# Altium PCB ST_LINK_V2-1.PcbDoc
Units mm, origin at the board's own origin, x right, y up, seen from the top; angles counter-clockwise.
Board outline 30 x 15 mm, 2 copper layers (Top Layer, Bottom Layer); 35 components, 35 nets, 144 pads, 65 vias.
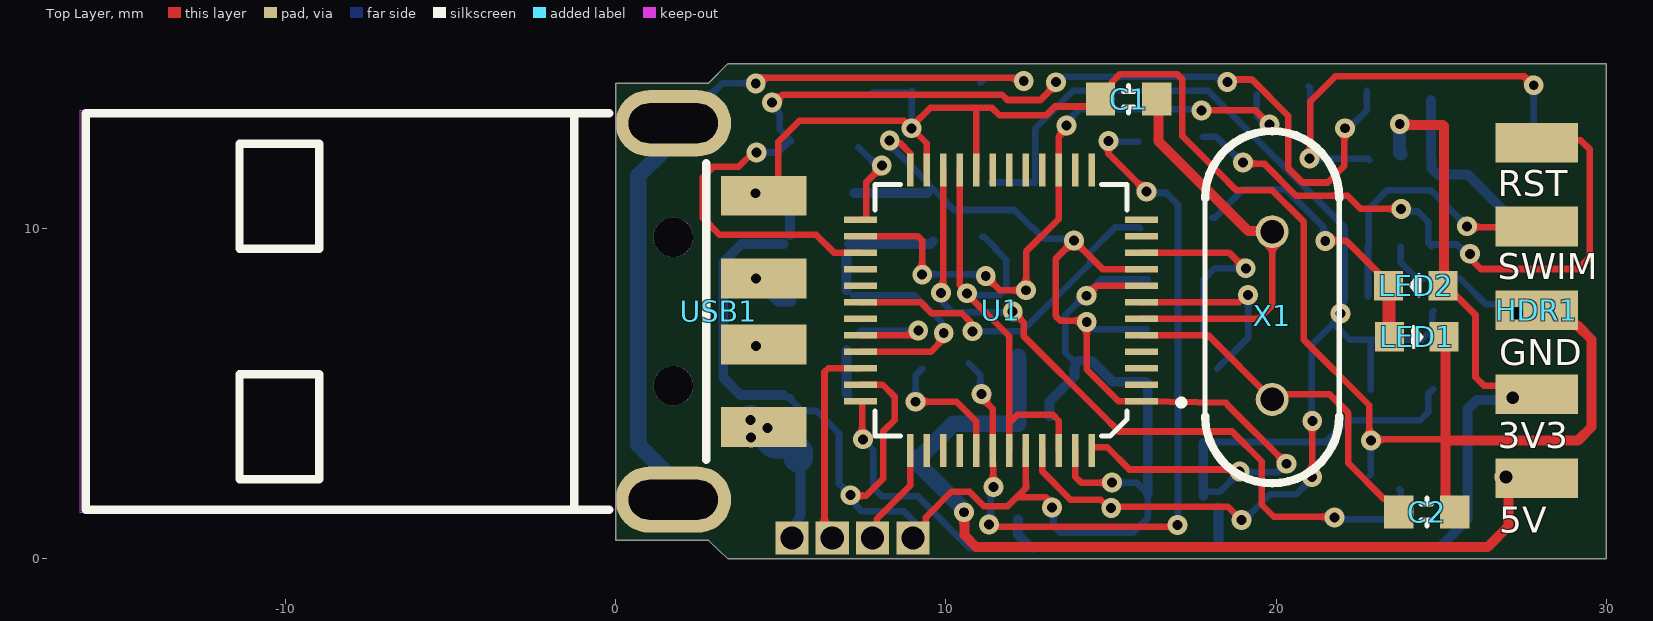
[diagram p0: Top Layer view]
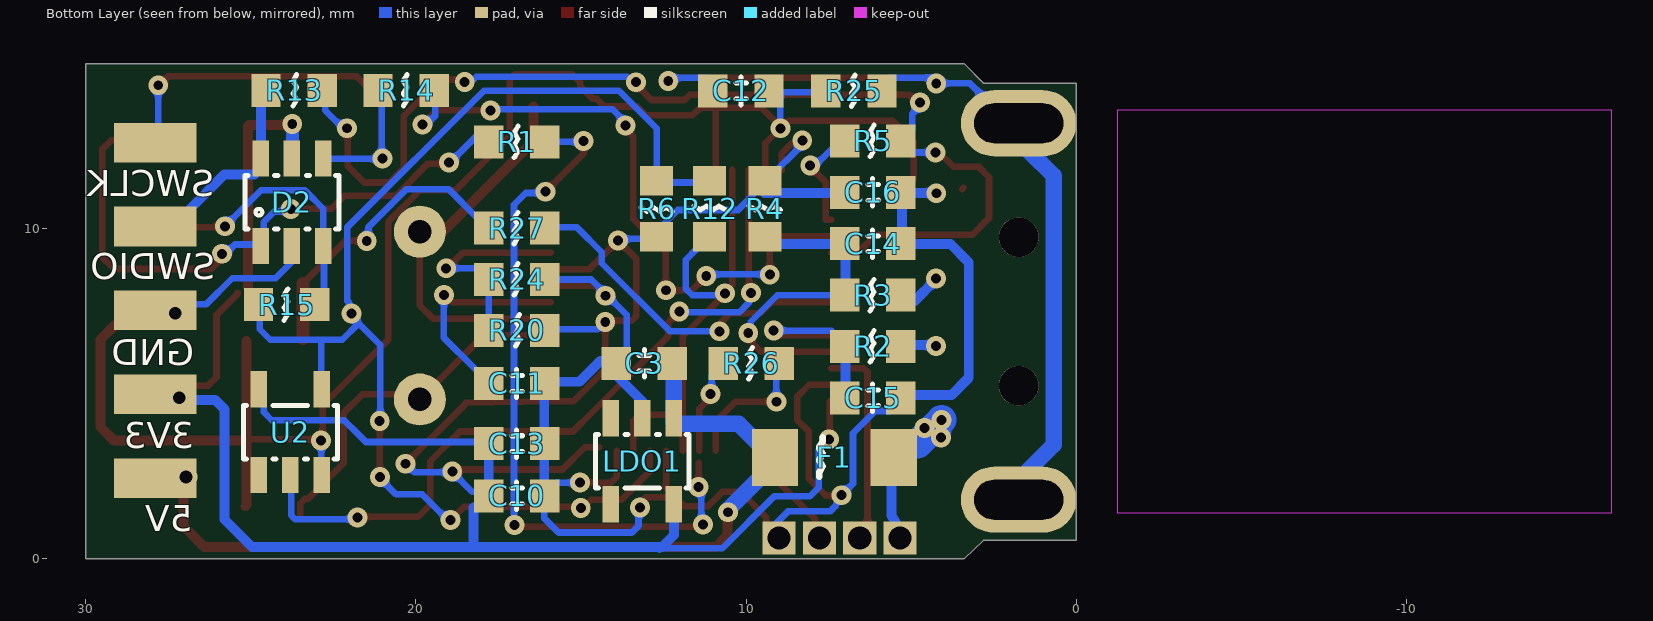
[diagram p1: Bottom Layer view, seen from below]
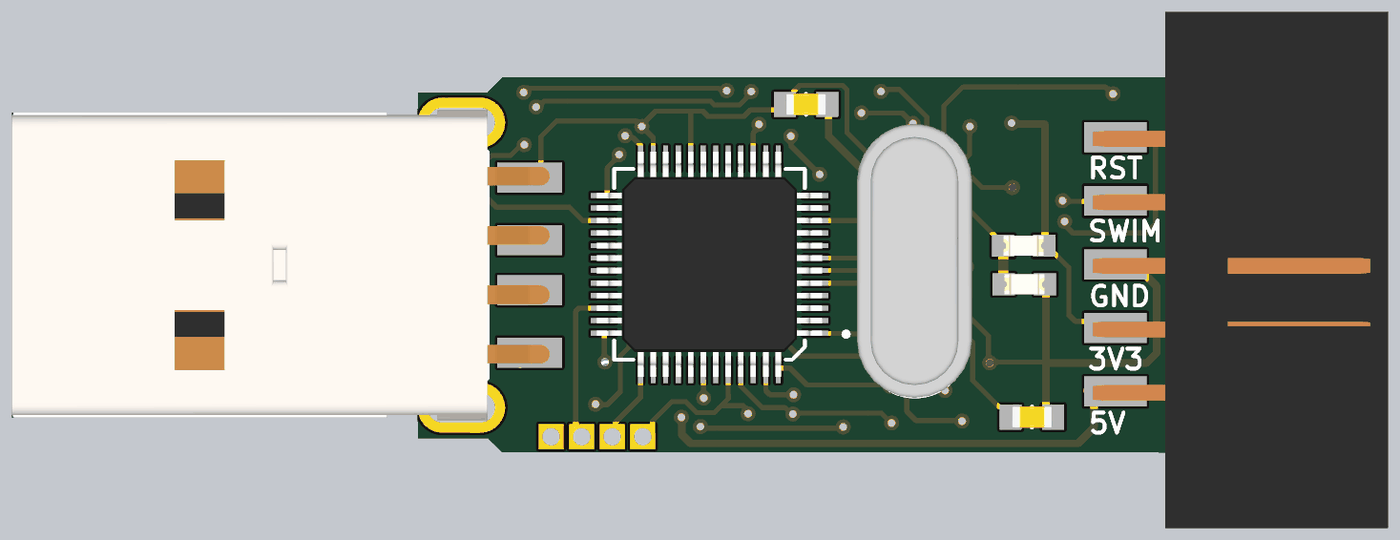
[diagram p2: 3D render of the assembled board from above, using the file's embedded part models]
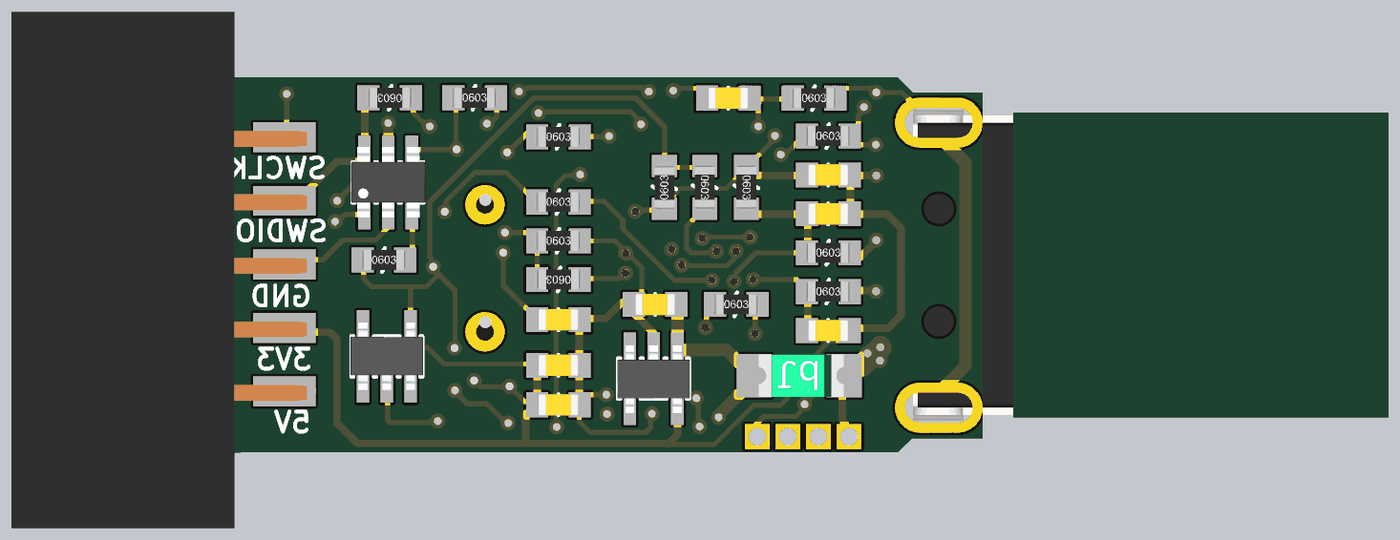
[diagram p3: 3D render of the assembled board from below, using the file's embedded part models]

## Layer stack, top to bottom
Top Solder: solder mask 0.0102, Solder Resist, Dk 3.5
Top Layer: signal copper 0.0356
Dielectric 1: dielectric 0.32, FR-4, Dk 4.8
Bottom Layer: signal copper 0.0356
Bottom Solder: solder mask 0.0102, Solder Resist, Dk 3.5

## Board outline
0,0.56 2.809,0.56 3.4,0 30,0 30,15 3.4,15 2.8,14.4 0,14.4

## Design rules (kind name [scope] priority, off if disabled: settings)
Clearance [All] p1: gap=0.15 ignorepadtopadclearanceinfootprint=FALSE
DiffPairsRouting [All] p1: maxlimit=0.254 minlimit=0.254 mostfreqgap=0.254 toplayer_minwidth=0.381 toplayer_maxwidth=0.381 toplayer_prefwidth=0.381 bottomlayer_minwidth=0.381 bottomlayer_maxwidth=0.381 bottomlayer_prefwidth=0.381 maxuncoupledlength=12.7
HoleSize [All] p1: absolutevalues=TRUE maxlimit=4 minlimit=0.025 maxpercent=80.000 minpercent=20.000
MinimumSolderMaskSliver [All] p1: minsoldermaskwidth=0
PolygonConnect CAM_PolygonConnect_$Net0 [InNet('$Net0')] p1: connectstyle=Direct reliefconductorwidth=0.254 reliefentries=4 polygonreliefangle="90 Angle" airgapwidth=0.254
PolygonConnect [All] p2: connectstyle=Relief reliefconductorwidth=0.254 reliefentries=4 polygonreliefangle="90 Angle" airgapwidth=0.254
RoutingVias [All] p1: holewidth=0.711 width=1.27 viastyle="Through Hole" minholewidth=0.711 minwidth=1.27 maxholewidth=0.711 maxwidth=1.27
SilkToSilkClearance [All] p1: silktosilkclearance=0
SilkToSolderMaskClearance [IsPad] p1: minsilkscreentomaskgap=0 clearancetoexposedcopper=TRUE
SolderMaskExpansion [All] p1: expansion=0.102 istentingtop=FALSE
SupplyNets "Schematic Supply Nets_6" [InNet('+3V3')] p1: voltage=0.000
SupplyNets "Schematic Supply Nets_5" [InNet('EGND')] p2: voltage=0.000
SupplyNets "Schematic Supply Nets_4" [InNet('VUSB')] p3: voltage=0.000
SupplyNets "Schematic Supply Nets" [InNet('GND')] p4: voltage=0.000
Width [All] p1: maxlimit=1 minlimit=0.2 preferedwidth=0.254
25 further rules are at their usual default settings.

## Classes and differential pairs
differential pair USB: +USB_P -USB_N

## Components (designator, comment, footprint, x,y, rotation, side; value= is the part's Value field where it differs from the comment)
C1 "20pF" C0603-NO 15.531,13.922 r180 top
C2 "20pF" C0603-NO 24.556,1.418 r0 top
C3 "100nF" C0603-NO 13.08,5.924 r180 bottom
C10 "100nF" C0603-NO 16.941,1.91 r0 bottom
C11 "100nF" C0603-NO 16.941,5.313 r0 bottom
C12 "100nF" C0603-NO 10.153,14.173 r0 bottom
C13 "100nF" C0603-NO 16.941,3.489 r0 bottom
C14 "47pF" C0603-NO 6.16,9.546 r0 bottom
C15 "47pF" C0603-NO 6.16,4.88 r0 bottom
C16 "100nF" C0603-NO 6.16,11.101 r0 bottom
D2 "SRV05-4" SOT23-6 23.752,10.801 r180 bottom
F1 "Resistor_FUSE" F1206 7.747,3.074 r0 bottom value=500mA
HDR1 "Header 5X2" IDC10_2SIDED 27.894,7.526 r0 top locked
LDO1 "XC6204B332MR" SOT23-5L 13.142,2.956 r0 bottom
LED1 "*" "CHIPLED_0603 - NO" 24.257,6.731 r270 top value=GREEN
LED2 "*" "CHIPLED_0603 - NO" 24.226,8.27 r90 top value=BLUE
R1 "100R" R0603-NO 16.941,12.626 r180 bottom
R2 "22R" R0603-NO 6.16,6.435 r180 bottom
R3 "22R" R0603-NO 6.16,7.991 r180 bottom
R4 "1.8K" R0603-NO 9.431,10.606 r270 bottom
R5 "100R" R0603-NO 6.16,12.656 r180 bottom
R6 "630R" R0603-NO 12.708,10.606 r90 bottom
R12 "220R" R0603-NO 11.1,10.606 r270 bottom
R13 "100R" R0603-NO 23.685,14.19 r0 bottom
R14 "100R" R0603-NO 20.295,14.19 r180 bottom
R15 "100R" R0603-NO 23.912,7.703 r180 bottom
R20 "10K" R0603-NO 16.941,6.92 r0 bottom
R24 "10K" R0603-NO 16.941,8.465 r180 bottom
R25 "1M" R0603-NO 6.731,14.173 r180 bottom
R26 "220R" R0603-NO 9.838,5.924 r180 bottom
R27 "1K" R0603-NO 16.941,10.021 r180 bottom
U1 "STM32F103CBT6" "QFP48 7X7" 11.665,7.526 r90 top locked
U2 "74LVC1G07GV,125" SOT23-5L 23.8,3.84 r180 bottom
USB1 "USB ConnectorsUSBMINIB - Surface Mount Female Mini-B USB Connector 4UConnector: 06564   By microbuilder.euThru-hole RA Female Mini-B USB Connector 4UConnector: 18732   By ladyada.net" USB-A-SMT_48037-0001 2.794,7.493 r270 top locked
X1 "8MHz" XTAL1 19.878,7.369 r270 top locked

## Footprints (in the part's own frame and the unit in brackets; to place one, negate y for a bottom-side part, rotate by r counter-clockwise, add the part's x,y. Pads: shape width x height; smd on the part's side, far side on the other; paste and mask are expansions set on the pad)
C0603-NO [mm]
  rect 0.889x1 smd mask+0.102: 1(-0.85,0) 2(0.85,0)
  silkscreen extent -0.16,-0.42 0.15,0.42, body extent -0.8,-0.43 0.81,0.43, height 0.8
"CHIPLED_0603 - NO" [mil]
  rect 35x35 smd: A(0,-32.5) C(0,32.5)
  silkscreen extent -11,-4 12,5, body extent -16,-31 16,31, height 22
F1206 [mm]
  rect 1.4x1.72 smd: 1(-2.222,0) 2(1.376,0)
  silkscreen extent -0.07,-0.6 0.04,0.58, body extent -2.21,-0.85 1.19,0.85, height 0.51
IDC10_2SIDED [mm]
  rect 2.5x1.2 smd: 1(0,5.08) 3(0,2.54) 5(0,0) 7(0,-2.54) 9(0,-5.08)
  rect 2.5x1.2 smd far side: 2(0,5.08) 4(0,2.54) 6(0,0) 8(0,-2.54) 10(0,-5.08)
  body extent -0.9,-10.55 10.9,10.09, height 4.13
"QFP48 7X7" [mm]
  rect 0.2x1 smd: 1(-2.75,-4.25) 2(-2.25,-4.25) 3(-1.75,-4.25) 4(-1.25,-4.25) 5(-0.75,-4.25) 6(-0.25,-4.25) 7(0.25,-4.25) 8(0.75,-4.25) 9(1.25,-4.25) 10(1.75,-4.25) 11(2.25,-4.25) 12(2.75,-4.25) 25(2.75,4.25) 26(2.25,4.25) 27(1.75,4.25) 28(1.25,4.25) 29(0.75,4.25) 30(0.25,4.25) 31(-0.25,4.25) 32(-0.75,4.25) 33(-1.25,4.25) 34(-1.75,4.25) 35(-2.25,4.25) 36(-2.75,4.25)
  rect 1x0.2 smd: 13(4.25,-2.75) 14(4.25,-2.25) 15(4.25,-1.75) 16(4.25,-1.25) 17(4.25,-0.75) 18(4.25,-0.25) 19(4.25,0.25) 20(4.25,0.75) 21(4.25,1.25) 22(4.25,1.75) 23(4.25,2.25) 24(4.25,2.75) 37(-4.25,2.75) 38(-4.25,2.25) 39(-4.25,1.75) 40(-4.25,1.25) 41(-4.25,0.75) 42(-4.25,0.25) 43(-4.25,-0.25) 44(-4.25,-0.75) 45(-4.25,-1.25) 46(-4.25,-1.75) 47(-4.25,-2.25) 48(-4.25,-2.75)
  silkscreen extent -3.81,-5.52 3.81,3.81, body extent -4.5,-4.5 4.5,4.51, height 1.02
R0603-NO [mm]
  rect 0.889x1 smd: 1(-0.85,0) 2(0.85,0)
  silkscreen extent -0.08,-0.48 0.04,0.48, body extent -1.06,-0.4 1.04,0.4, height 0.5
SOT23-5L [mm]
  rect 0.5x1.1 smd: 1(-0.95,-1.3) 2(0,-1.3) 3(0.95,-1.3) 4(0.95,1.3) 5(-0.95,1.3)
  silkscreen extent -1.42,-0.81 1.42,0.81, body extent -1.45,-1.33 1.45,1.37, height 1.45
SOT23-6 [mm]
  rect 0.5x1.1 smd: 1(-0.95,-1.327) 2(0,-1.327) 3(0.95,-1.327) 4(0.95,1.327) 5(0,1.327) 6(-0.95,1.327)
  silkscreen extent -1.42,-0.81 1.42,0.81, body extent -1.49,-1.41 1.51,1.43, height 1.2
USB-A-SMT_48037-0001 [mm]
  rect 1.2x2.6 smd: 1(3.5,1.686) 2(1,1.686) 3(-1,1.686) 4(-3.5,1.686)
  oval 2x3.5 hole 1.2 slot 2.7 at 90 deg: 5(-5.7,-1.05) 5(5.7,-1.05)
  round 1.2 hole 1.2 unplated: ""(-2.25,-1.05) ""(2.25,-1.05)
  Keep-Out Layer board cut-out: -6.096,-4.03 6.096,-4.03 6.096,-19.016 -6.096,-19.016
  silkscreen extent -6,-18.85 6,-0.05, body extent -6.21,-19.02 6.21,2.49, height 4.45
XTAL1 [mm]
  round 1 / inner round 1.575 / far side round 1.575 hole 0.711: 1(-2.54,0) 2(2.54,0)
  silkscreen extent -5.59,-2.03 5.08,2.03, body extent -5.77,-2.31 5.18,2.29, height 3.35

## Part data
C1 C2 C3 C10 C11 C12 C13 C14 C15 C16: library part Cap_0603, "CAP CER ?nF ?V X7R 0603"
D2: Breakdown Voltage=9V, JLCPCB Part Class="Extended Part", Manufacturer=MSKSEMI(美森科), Maximum Clamping Voltage=15V, Peak Pulse Power Dissipation (Ppp)@10/1000us=60W, Reverse Stand-Off Voltage (Vrwm)=5V, Add into BOM=yes, Convert to PCB=yes, Datasheet=https://atta.szlcsc.com/upload/public/pdf/source/20220222/F01BB54FA817A9A0327E7B3253CC806E.pdf, Device=SRV05-4_C2836319, LCSC Part Name=SRV05-4, Manufacturer Part=SRV05-4, Supplier=LCSC, Supplier Footprint=SOT-23-6, Supplier Part=C2836319, Symbol=SRV05-4_C2836319, Type=ESD
F1: "Resetable fuse"
HDR1: "Header, 5-Pin, Dual row", Revision="17-Jul-2002: Re-released for DXP Platform."
LDO1: Dropout Voltage=330mV@(100mA), JLCPCB Part Class="Extended Part", LCSC Part Name="输入10V 输出3.3V 150mA", Manufacturer=TOREX(特瑞仕), Max Output Current=150mA, Maximum Input Voltage=10V, Output Voltage=3.3V, Power Supply Rejection Ratio (PSRR)=70dB@(10kHz), Add into BOM=yes, Convert to PCB=yes, Datasheet=https://atta.szlcsc.com/upload/public/pdf/source/20170421/1492744953040.pdf, Device=XC6204B332MR, Manufacturer Part=XC6204B332MR, Number of Outputs=1, Output Polarity="Positive electrode", Supplier=LCSC, Supplier Footprint=SOT-23-5, Supplier Part=C80697, Symbol=XC6204B332MR
LED1 LED2: library part LEDCHIP-LED0603, "SMD lamp beads"
R1 R2 R3 R4 R5 R6 R12 R13 R14 R15 R20 R24 R25 R26 R27: library part Res_0603, "RES SMD ?K OHM 1% 1/10W 0603"
U1: "Medium-density performance line ARM-based 32-bit MCU with 64KB Flash", Manuf_1=STM, Manuf_Part_1=STM32F103C8T6, Distrib=ST, ECCN_US/EU=3A991A2/NEC, Order=STM32F103C8T6, Provided=ST, Ref St=9175981
U2: JLCPCB Part Class="Extended Part", Manufacturer=Nexperia(安世), Operating Temperature=-40℃~+125℃, Sink Current=32mA, Supply Voltage=1.65V~5.5V, Add into BOM=yes, Convert to PCB=yes, Datasheet=https://atta.szlcsc.com/upload/public/pdf/source/20130521/1457706602667.pdf, Device=74LVC1G07GV,125, LCSC Part Name=74LVC1G07GV,125, Logic Family=74LVC, Manufacturer Part=74LVC1G07GV,125, Number of Bits per Element=1, Number of Elements=1, Output Type="Open Drain", Supplier=LCSC, Supplier Footprint=SOT-753, Supplier Part=C12511, Symbol=74LVC1G07GV,125
USB1: library part USB-MALE, NAME=USB_Micro_5S_B
X1: library part XTAL, "Crystal Oscillator", LatestRevisionDate=17-Jul-2002, LatestRevisionNote="Re-released for DXP Platform.", PackageReference=R38, Published=8-Jun-2000, Publisher="Altium Limited"

## Free pads (board coordinates)
  rect 1x1 hole 0.7: 2(5.334,0.631) 2(6.555,0.631) 2(7.777,0.631) 2(8.998,0.631)

## Via types
v1: diameter 0.6, hole 0.3, Top Layer to Bottom Layer, tented both sides, 62 vias
v2: diameter 0.686, hole 0.381, Top Layer to Bottom Layer, tented both sides, 3 vias

## Nets (pads, with @x,y where several pads share a name; then routed paths per layer and width w, separated by ;. In a path a pad name is that pad's centre, name@x,y a point inside that pad or via, vN(x,y) a via of type N, cw(c..) or ccw(c..) an arc to the next point about the centre after c; other vN are vias at no path point)
+3V3: C10.2 C13.2 C16.2 D2.5 HDR1.7 HDR1.8 LDO1.5 LED2.A R4.1 R6.1 R20.1 U1.1 U1.9 U1.24 U1.36 U1.48 U2.5 | length 85.1
  Top Layer w0.2: U1.36 7.461,4.776 7.461,3.646 v1(7.486,3.621) ; v1@8.295,12.628 8.332,12.592 8.608,12.592 8.915,12.285 U1.24 ; U1.48@14.446,3.381 14.883,3.381 15.557,2.707 18.833,2.707 v1(18.894,2.646) ; U1.9 14.737,8.776 v1(13.873,9.639) 13.32,9.086 13.32,7.36 13.462,7.218 14.219,7.218 v1(14.262,7.175) 14.262,5.738 15.224,4.776 U1.1 18.481,4.728 ; 18.514,4.68 v1(20.312,2.882) ; LED2.A@25.4,8.064 25.4,8.025 26.035,7.39 26.035,5.502 26.29,5.247 27.634,5.247 HDR1.7
  Top Layer w0.3: v1@23.733,13.144 25.043,13.144 25.082,13.105 LED2.A@25.082,8.223
  Bottom Layer w0.2: v1(7.486,3.621) 7.486,3.617 7.799,3.304 7.799,2.161 8.067,1.893 9.148,1.893 10.716,0.325 12.581,0.325 12.621,0.286 ; v1@8.215,12.628 R4.1@9.406,11.438 ; R4.1@9.446,11.398 9.446,11.358 10.239,10.565 12.065,10.565 12.581,10.049 12.621,10.049 12.978,9.692 13.851,9.692 v1@13.93,9.612 ; v1@14.248,7.152 14.287,7.152 14.486,6.953 R20.1@16.073,6.953 ; C10.2 17.913,2.032 18.296,2.032 18.891,2.627 20.042,2.627 20.305,2.89 v1@20.32,2.905 ; C13.2@18.018,3.54 21.511,3.54 21.749,3.778 22.171,4.2 24.36,4.2 24.6,4.44 24.6,4.99 U2.5
  Bottom Layer w0.3: C16.2@7.223,11.081 R4.1@9.446,11.081 ; LDO1.5@12.184,1.198 12.184,0.722 12.541,0.365 24.963,0.365 25.797,1.198 25.797,4.532 26.075,4.81 27.345,4.81 HDR1.8@27.384,4.85 ; C10.2 C13.2 ; 18.256,0.405 18.256,1.556
  Bottom Layer w0.4: v1@23.733,13.224 23.733,12.311 D2.5@23.773,12.271
  other v1: 8.295,12.668 23.743,13.175
  other v2: 27.16,4.88
AIN_1: R20.2 R24.1 U1.10 | length 6.3
  Top Layer w0.2: U1.10 18.566,9.276 19.042,8.8 v1(19.08,8.8)
  Bottom Layer w0.2: R20.2 R24.1 ; R24.1@17.811,8.465 17.811,8.476 18.135,8.8 v1(19.08,8.8)
EGND: C12.2 R25.2 USB1.5 | length 24.8
  Top Layer w0.2: v1@4.207,14.414 4.216,14.424 4.366,14.573 12.025,14.573 12.144,14.454 v1@12.343,14.454
  Bottom Layer w0.2: USB1.5@1.744,13.193 2.007,13.193 3.215,14.401 v1(4.24,14.401) ; v1@4.326,14.454 4.445,14.573 R25.2@5.675,14.573 ; C12.2@11.033,14.414 11.192,14.573 v1@12.383,14.573
  Bottom Layer w0.5: USB1.5@1.429,12.351 0.68,11.602 0.68,3.455 USB1.5@1.667,2.468
  Bottom Layer w0.6: USB1.5@1.667,2.31 USB1.5@1.667,2.468
  other v1: 12.356,14.471
GND: C1.2 C2.2 C3.1 C10.1 C11.1 C12.1 C13.1 C14.1 C15.1 C16.1 D2.2 HDR1.5 HDR1.6 LDO1.2 LED1.C pad.2@8.998,0.631 R24.2 R25.1 U1.8 U1.20 U1.23 U1.35 U1.44 U1.47 U2.3 USB1.4 | length 106.6
  Top Layer w0.2: USB1.4@3.413,11.239 USB1.4@3.453,11.2 ; USB1.4@4.921,11.477 4.921,12.628 5.556,13.263 8.731,13.263 8.955,13.04 v1(8.96,13.04) ; v1@7.104,1.913 7.58,1.913 8.096,2.429 8.096,3.857 8.453,4.215 8.453,4.907 8.084,5.276 U1.35 ; pad.2@9.078,0.711 9.391,1.023 9.391,1.262 10.16,2.032 10.716,2.032 11.152,1.595 11.867,1.595 12.125,1.853 12.144,1.873 ; U1.23 9.415,12.585 v1(8.96,13.04) ; U1.20 10.915,13.657 ; U1.44 12.415,2.316 12.422,2.308 12.422,2.151 12.144,1.873 ; v1(13.21,1.553) 13.256,1.599 13.256,1.635 13.018,1.873 12.144,1.873 ; U1.47 13.915,2.485 14.09,2.31 v1@15.081,2.31 ; v1(14.252,7.97) 14.263,7.97 14.57,8.276 U1.8 ; 19.874,11.16 18.8,11.16 18.28,11.68 17.16,12.8 17.16,14.518 16.998,14.68 15.268,14.68 15.025,14.438 15.025,14.322 14.633,13.931 14.518,13.931 14.287,13.7 13.3,13.7 13.04,13.44 11.611,13.44 11.393,13.657 10.915,13.657 ; 19.877,11.163 20.84,10.2 20.84,6.632 22.82,4.651 22.82,3.619 25.122,3.619 25.162,3.619 ; v1(8.96,13.04) 8.96,13.095 9.522,13.657 10.915,13.657
  Top Layer w0.3: LED1.C@25.122,6.596 25.122,3.619 25.122,3.58 ; C2.2@25.162,1.595 25.122,1.635 25.122,3.58 ; HDR1.5 28.344,7.076 29.119,7.076 29.548,6.647 29.548,3.997 29.131,3.58 25.122,3.58
  Bottom Layer w0.2: C15.1@5.199,4.889 C15.1@5.239,4.889 ; C15.1 5.301,4.889 C15.1@5.239,4.889 ; v1@6.985,1.913 7.02,1.913 7.263,1.67 7.263,1.634 7.458,1.44 8.728,1.44 pad.2@9.247,0.921 ; v1(7.111,1.93) 6.76,2.281 6.76,3.805 6.085,4.48 5.648,4.48 C15.1@5.239,4.889 ; R25.1@7.779,14.137 8.93,14.137 C12.1@8.969,14.176 ; C12.1@8.93,13.978 8.958,13.978 8.96,13.976 v1(8.96,13.04) ; v1@13.256,1.556 13.256,1 13.456,0.8 15.675,0.8 16.113,1.238 16.113,1.908 16.111,1.91 16.111,1.965 15.767,2.31 15.029,2.31 v1(15.028,2.311) ; C3.1 13.613,6.241 13.613,7.39 14.223,8 14.684,8.461 16.107,8.461 R24.2@16.111,8.465 ; U2.3 22.86,2.55 22.86,3.579 v1(22.869,3.588) ; D2.2@23.773,9.453 23.773,8.977 24.249,8.501 25.559,8.501 26.352,7.707 27.265,7.707 HDR1.6@27.305,7.667
  Bottom Layer w0.3: v1@4.207,11.081 5.199,11.081 5.244,11.035 5.255,11.025 5.278,11.001 C14.1@5.278,9.811 ; C15.1@5.08,4.969 3.77,4.969 3.254,5.485 3.254,8.977 3.81,9.533 C14.1@5.08,9.533 ; LDO1.2@13.137,4.334 13.137,4.77 13.891,5.524 C3.1@13.891,5.762 ; C3.1 14.006,6.001 14.407,6.001 15.042,5.366 16.059,5.366 16.111,5.313 C10.1@16.111,1.965
  other v1: 4.237,11.073
  other v2: 27.28,7.44
LED_STLINK: R27.2 U1.30 | length 10.5
  Top Layer w0.2: U1.30 9.224,7.776 9.56,7.44 10.48,7.44 10.728,7.192 10.728,6.969 v1(10.805,6.892)
  Bottom Layer w0.2: v1(10.805,6.892) 12.306,6.892 14.367,8.953 14.367,9.287 15.129,10.049 15.835,10.049 R27.2@15.875,10.009
NetD2_1: D2.1 HDR1.1 R1.1 | length 19
  Top Layer w0.2: v1(18.99,12.003) 19.023,11.97 19.63,11.97 20.603,10.997 ; 20.606,11 22.16,11 22.562,10.598 v1(23.785,10.598) ; v1@25.876,9.215 25.876,9.096 26.194,8.779 29.131,8.779 29.498,9.146 29.498,12.4 29.218,12.68 27.968,12.68 HDR1.1
  Bottom Layer w0.2: R1.1@17.78,12.787 18.177,12.787 18.975,11.989 v1@19.01,11.954 ; v1(23.785,10.598) 23.861,10.522 24.284,10.522 24.605,10.201 24.605,9.571 D2.1 24.748,9.52 25.477,9.52 25.757,9.24 v1(25.866,9.24)
NetD2_3: D2.3 HDR1.3 R15.2 | length 8.4
  Top Layer w0.2: v1@25.797,10.049 27.877,10.049 HDR1.3
  Bottom Layer w0.2: R15.2@22.781,7.945 D2.3@22.781,9.453 ; D2.3 22.802,10.602 23.36,11.16 24.695,11.16 v1(25.782,10.072)
NetD2_4: D2.4 HDR1.2 R14.1 | length 14.7
  Top Layer w0.2: v1(21.01,12.125) 21.034,12.15 21.034,13.859 21.788,14.613 27.503,14.613 v1@27.781,14.335
  Bottom Layer w0.2: R14.1@20.995,14.295 21.034,14.256 v1@21.034,12.152 ; v1@21.034,12.112 22.781,12.112 D2.4@22.82,12.073 ; v1(27.8,14.343) 27.8,12.7 HDR1.2
NetD2_6: D2.6 HDR1.4 R13.2 | length 4.8
  Bottom Layer w0.3: D2.6@24.686,12.192 R13.2@24.686,13.898 ; D2.6 24.702,11.828 24.89,11.64 25.8,11.64 HDR1.4@26.915,10.525
NetF1_1: F1.1 pad.2@5.334,0.631 USB1.1 | length 4.9
  Bottom Layer w0.3: pad.2@5.278,0.682 5.278,0.802 5.596,1.317 5.596,3.003 F1.1
  Bottom Layer w0.6: v1@4.08,3.865 v1(4.08,4.21)
  Bottom Layer w0.9: v1(4.08,4.21) 4.807,3.484 5.274,3.484 5.524,3.234 F1.1
  other v1: 4.097,3.675 4.597,3.967
NetLED1_A: LED1.A LED2.C R27.1 | length 8.8
  Top Layer w0.2: v1(21.486,9.632) 22.126,9.632 LED2.C@23.416,8.342
  Top Layer w0.4: LED1.A@23.416,6.675 LED2.C@23.416,8.342
  Bottom Layer w0.2: R27.1@18.058,10.327 18.137,10.327 19.01,11.2 20.28,11.2 21.431,10.049 21.431,9.771 v1@21.528,9.674
NetR2_2: R2.2 USB1.2 | length 0.9
  Bottom Layer w0.3: v1@4.247,6.477 R2.2@5.12,6.477
  other v1: 4.251,6.447
NetR3_2: R3.2 USB1.3 | length 1.4
  Bottom Layer w0.3: v1@4.247,8.501 4.247,8.461 4.921,7.787 R3.2@5.318,7.787
  other v1: 4.242,8.491
NetR26_2: R26.2 U1.41 | length 4.1
  Top Layer w0.2: v1(9.08,4.76) 10.32,4.76 10.915,4.165 U1.41
  Bottom Layer w0.2: v1(9.08,4.76) 9.08,5.556 R26.2@9.287,5.762
OSC_IN: C2.1 U1.5 X1.2 | length 11
  Top Layer w0.2: U1.5 17.93,6.776 X1.2 20.031,4.982 20.39,4.982 20.395,4.987 21.613,4.987 22.186,4.414 22.186,2.894 23.262,1.818 23.362,1.818 23.495,1.684 C2.1@23.495,1.357
OSC_OUT: C1.1 U1.6 X1.1 | length 12
  Top Layer w0.2: U1.6 19.476,7.276 19.878,7.678 X1.1
  Top Layer w0.3: C1.1@16.431,13.7 16.431,12.649 19.153,9.927 19.859,9.927 X1.1
PB11: U1.22 U2.2 | length 22.4
  Top Layer w0.2: v1(9.845,8.058) 9.915,8.128 U1.22 ; v1(12.02,7.492) 12.36,7.152 12.36,6.737 14.684,4.413 15.24,3.857 18.663,3.857 19.56,2.96 19.56,1.641 19.923,1.278 v1@21.749,1.278
  Bottom Layer w0.2: v1@9.763,7.906 9.888,7.906 9.921,7.873 9.921,7.748 10.2,7.469 v1@11.986,7.469 ; v1@21.749,1.198 23.654,1.198 23.773,1.317 23.773,2.072 U2.2@23.733,2.111
  other v1: 21.764,1.257
STLINK_RX: U1.13
STLINK_TX: U1.12
STM_JTCK: pad.2@7.777,0.631 U1.37 | length 3.1
  Top Layer w0.2: pad.2@7.898,0.643 7.898,1.198 8.915,2.215 U1.37
STM_JTMS: pad.2@6.555,0.631 U1.34 | length 6.3
  Top Layer w0.2: pad.2@6.555,0.631 6.32,0.866 6.32,5.659 6.437,5.776 U1.34
STM_RST: C11.2 U1.7 | length 5.8
  Top Layer w0.2: U1.7 18.88,7.776 19.099,7.995 v1(19.149,7.995)
  Bottom Layer w0.2: C11.2@18.217,5.762 19.149,6.694 v1@19.149,7.835
SWIM: R6.2 R12.1 R15.1 U1.45 U2.4 | length 37.7
  Top Layer w0.2: U1.45 12.915,2.65 12.938,2.627 13.772,1.794 14.684,1.794 v1@14.922,1.556 ; v1(15.002,1.539) v1@15.023,1.56 ; v1@15.023,1.58 18.537,1.58 18.937,1.18 v1(18.946,1.18) ; v1(21.08,2.482) 21.087,2.489 21.087,4.169 v1(21.093,4.176)
  Bottom Layer w0.2: R12.1@11.351,11.398 12.7,11.398 12.7,13.025 13.851,14.176 17.939,14.176 22.08,10.035 22.08,7.821 22.023,7.764 22.023,7.505 v1(21.946,7.428) ; v1@18.971,1.079 18.971,1.119 18.989,1.137 19.804,1.952 20.598,1.952 v1@21.074,2.429 ; v1@21.074,4.175 21.074,6.477 v1@21.907,7.31 ; 21.749,7.112 22.225,6.636 22.86,6.636 ; U2.4@22.86,5.127 22.86,6.636 ; R15.1@24.765,7.509 24.725,7.469 24.725,6.953 24.408,6.636 22.86,6.636
SWIM_IN: R12.2 U1.21 U1.43 U1.46 | length 14.9
  Top Layer w0.2: U1.21 10.415,8.289 10.594,8.11 v1@10.594,8.002 ; v1@10.625,8.034 11.915,6.744 11.915,4.115 ; U1.43 11.915,4.115 ; U1.46 13.415,4.185 13.24,4.36 12.16,4.36 11.915,4.115
  Bottom Layer w0.2: v1@10.597,7.985 11.628,7.985 11.829,8.186 ; R12.2 11.155,9.756 11.5,9.412 11.5,9.382 11.825,9.056 11.825,8.19
  other v1: 10.634,8.042
T_JTCK: R14.2 U1.15 U1.26 | length 19.5
  Top Layer w0.2: U1.26 9.144,9.776 9.279,9.641 v1(9.279,8.607) ; v1(11.204,8.563) 11.631,8.135 v1(12.425,8.135) 12.425,9.305 13.415,10.295 U1.15 13.415,12.788 13.645,13.018 v1(13.645,13.126) ; v1(17.74,13.581) 19.372,13.581 19.793,13.16 v1(19.8,13.16)
  Bottom Layer w0.2: v1@9.287,8.62 11.112,8.62 v1@11.152,8.58 ; v1@13.613,13.144 13.613,13.184 14.049,13.621 17.701,13.621 v1(17.74,13.581) ; R14.2@19.407,14.057 19.407,13.429 19.599,13.237 19.723,13.237 v1(19.8,13.16)
T_JTDI: U1.17
T_JTDO: U1.16
T_JTMS: R5.2 R13.1 U1.27 | length 33.8
  Top Layer w0.2: v1@4.286,12.271 4.116,12.271 3.725,11.88 2.96,11.88 2.64,11.56 2.64,10.32 3.149,9.811 6.072,9.811 6.607,9.276 U1.27 ; v1@4.683,13.819 4.813,13.819 5.051,14.057 11.703,14.057 11.862,13.898 12.859,13.898 v1@13.295,14.335 ; v1(18.52,14.44) 18.597,14.517 19.265,14.517 20.36,13.422 20.36,11.84 20.8,11.4 21.56,11.4 22.066,11.906 v1@22.066,13.025
  Bottom Layer w0.2: v1(4.262,12.308) 4.914,12.308 R5.2@5.258,12.653 ; v1(4.734,13.818) 4.734,13.71 4.965,13.478 4.965,13.001 R5.2 ; v1(13.333,14.437) 13.442,14.437 13.605,14.6 18.171,14.6 18.254,14.517 18.443,14.517 v1(18.52,14.44) ; v1@22.106,13.025 22.185,13.025 22.741,13.581 R13.1@22.741,14.176
  other v1: 22.081,13.041
T_NRST: R1.2 R26.1 U1.42 | length 24.1
  Top Layer w0.2: v1(11.073,4.993) 11.073,4.885 11.415,4.544 U1.42 ; v1@11.311,1.04 11.373,0.978 16.968,0.978 v1(17.012,1.022) ; v1@11.43,2.151 U1.42@11.43,2.905 ; v1@14.922,12.509 14.922,12.271 v1(16.073,11.12)
  Bottom Layer w0.2: R26.1 11.033,5.58 11.033,5.034 v1(11.073,4.993) ; v1@11.311,1.04 11.351,1.079 v1@11.351,2.151 ; v1@14.922,12.628 R1.2@15.835,12.628 ; v1@16.153,11.081 16.669,11.081 17.026,10.723 v1@17.026,0.96
  other v1: 11.303,1.037 11.435,2.177 14.917,12.653
T_SWDIO_IN: R5.1 U1.25 | length 2.9
  Top Layer w0.2: U1.25 7.58,10.276 7.58,11.398 7.898,11.716 7.898,11.755 v1(8.057,11.914)
  Bottom Layer w0.2: R5.1@7.342,12.47 7.977,11.835 v1@8.017,11.835
T_SWO: U1.31
USB_N: C15.2 R2.1 U1.32 | length 5
  Top Layer w0.2: U1.32 8.904,6.776 9.054,6.926 v1@9.162,6.926
  Bottom Layer w0.2: R2.1@7.342,6.834 7.422,6.913 v1@9.168,6.913
  Bottom Layer w0.3: R2.1@6.985,6.318 6.985,5.008 C15.2@7.025,4.969
  other v1: 9.162,6.92
USB_P: C14.2 R3.1 R4.2 U1.33 | length 10
  Top Layer w0.2: U1.33 9.543,6.276 9.857,6.59 9.857,6.844 v1@9.933,6.92
  Bottom Layer w0.2: R3.1@7.183,7.985 9.055,7.985 9.857,7.183 9.857,6.917 v1(9.933,6.84)
  Bottom Layer w0.3: R3.1@6.985,8.144 C14.2@6.985,9.255 ; C14.2@7.064,9.533 9.525,9.533 R4.2@9.604,9.612
USB_RENUMn: U1.38
VUSB: C3.2 F1.2 HDR1.9 HDR1.10 LDO1.1 | length 26.4
  Top Layer w0.3: v1@10.557,1.317 10.557,0.722 10.914,0.365 26.405,0.365 27.04,1 HDR1.9@27.04,2.174
  Bottom Layer w0.5: F1.2 9.123,2.914 10.523,1.515 10.523,1.431 v1(10.542,1.412) ; F1.2@9.163,3.034 10.225,4.096 12.184,4.096 C3.2@12.184,6.12
  other v2: 26.96,2.48
pads on no net: LDO1.3 LDO1.4 U1.2 U1.3 U1.4 U1.11 U1.14 U1.18 U1.19 U1.28 U1.29 U1.39 U1.40 U2.1 USB1.

## Silkscreen, mask and mechanical layers (free items; w line width, h text height)
Top Overlay:
  text "RST" at 26.71,10.99 h0.8
  text "SWIM" at 26.71,8.47 h0.8
  text "GND" at 26.75,5.87 h0.8
  text "3V3" at 26.71,3.35 h0.8
  text "5V" at 26.75,0.79 h0.8
Bottom Overlay:
  text "SWCLK" at 26.11,10.99 h0.8
  text "SWDIO" at 26.07,8.47 h0.8
  text "GND" at 26.71,5.87 h0.8
  text "3V3" at 26.71,3.35 h0.8
  text "5V" at 26.75,0.83 h0.8